# Altium PCB Brd_4_Sensor_Shield_Kevin_Tom.PcbDoc
Units mil, origin at the board's own origin, x right, y up, seen from the top; angles counter-clockwise.
Board outline 2710 x 2110 mil, 4 copper layers (Top Layer 1, Layer 1, Layer 2, Bottom Layer 1), stack 75.712 mil thick; 44 components, 24 nets, 150 pads, 67 vias.
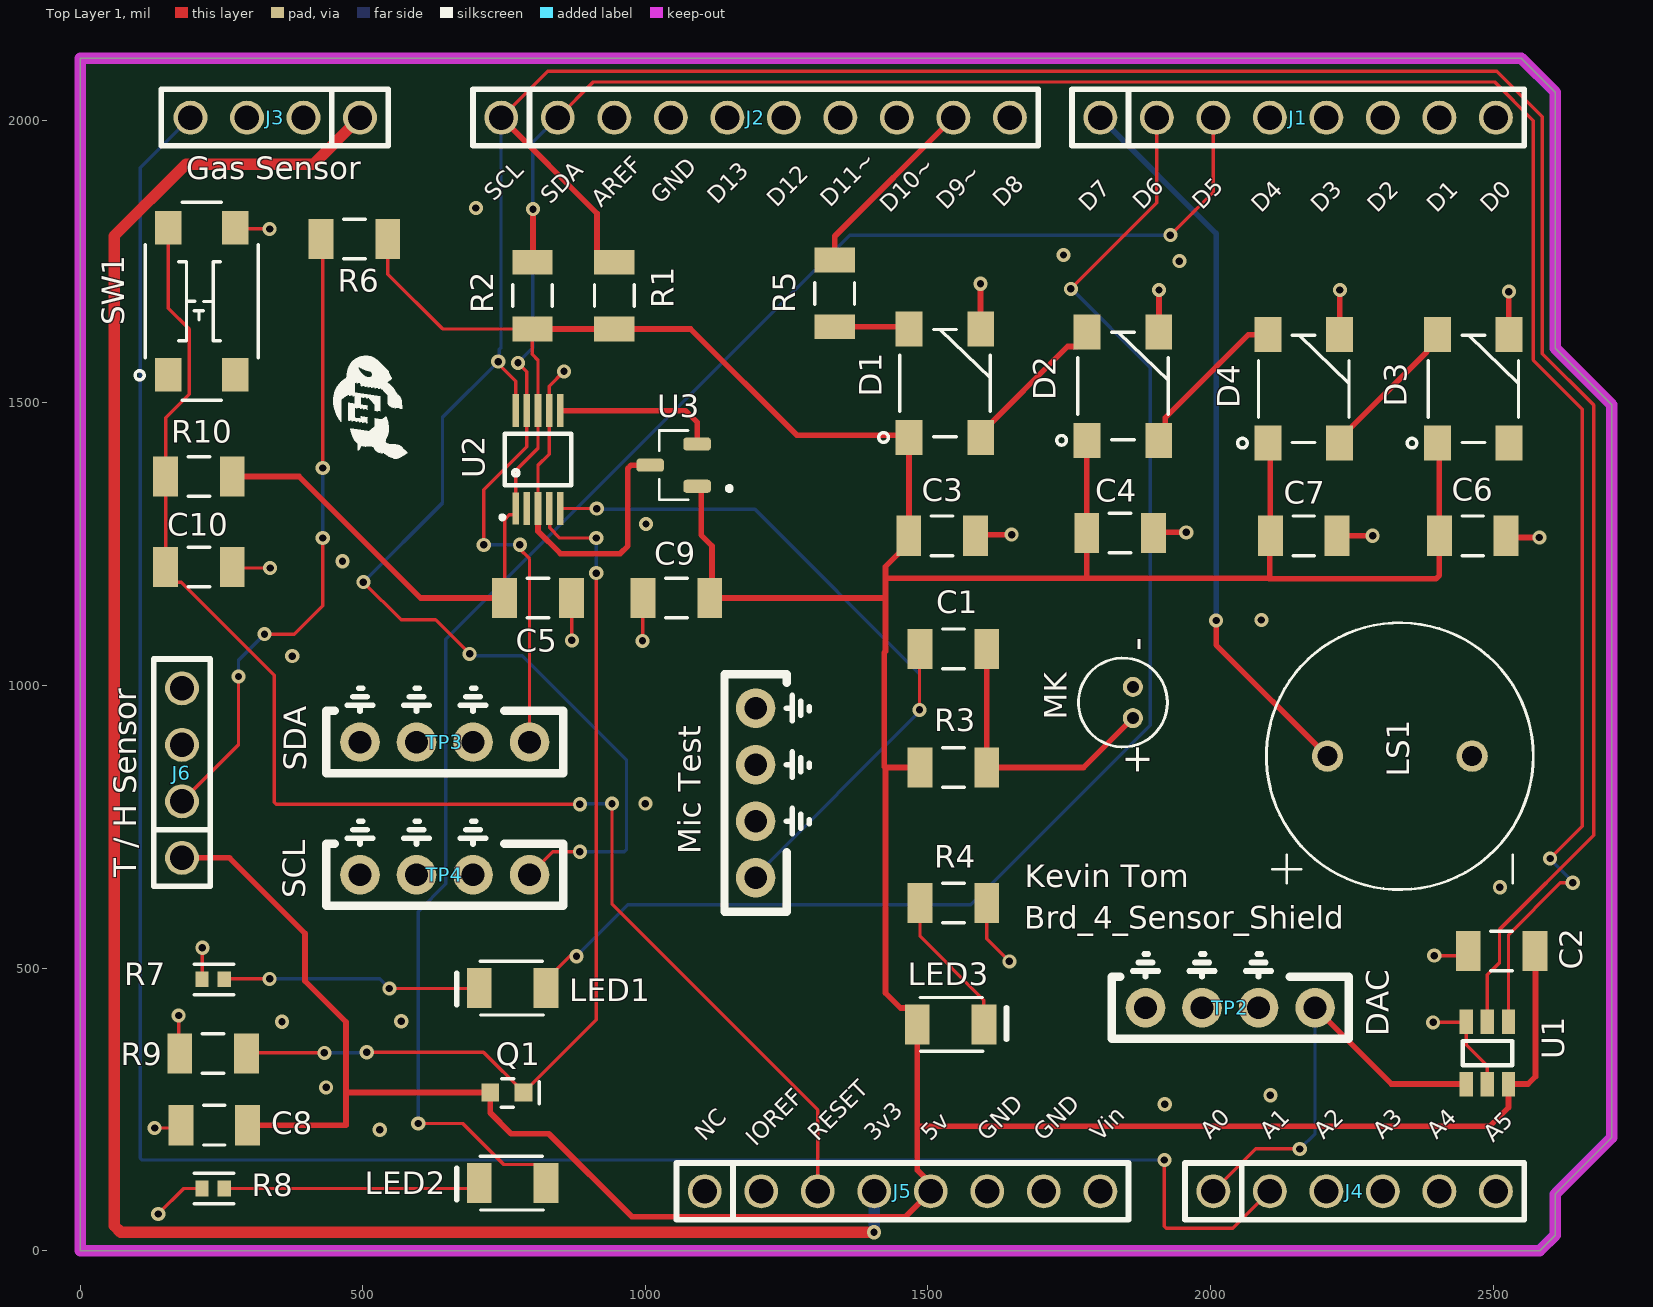
[diagram p0: Top Layer 1 view]
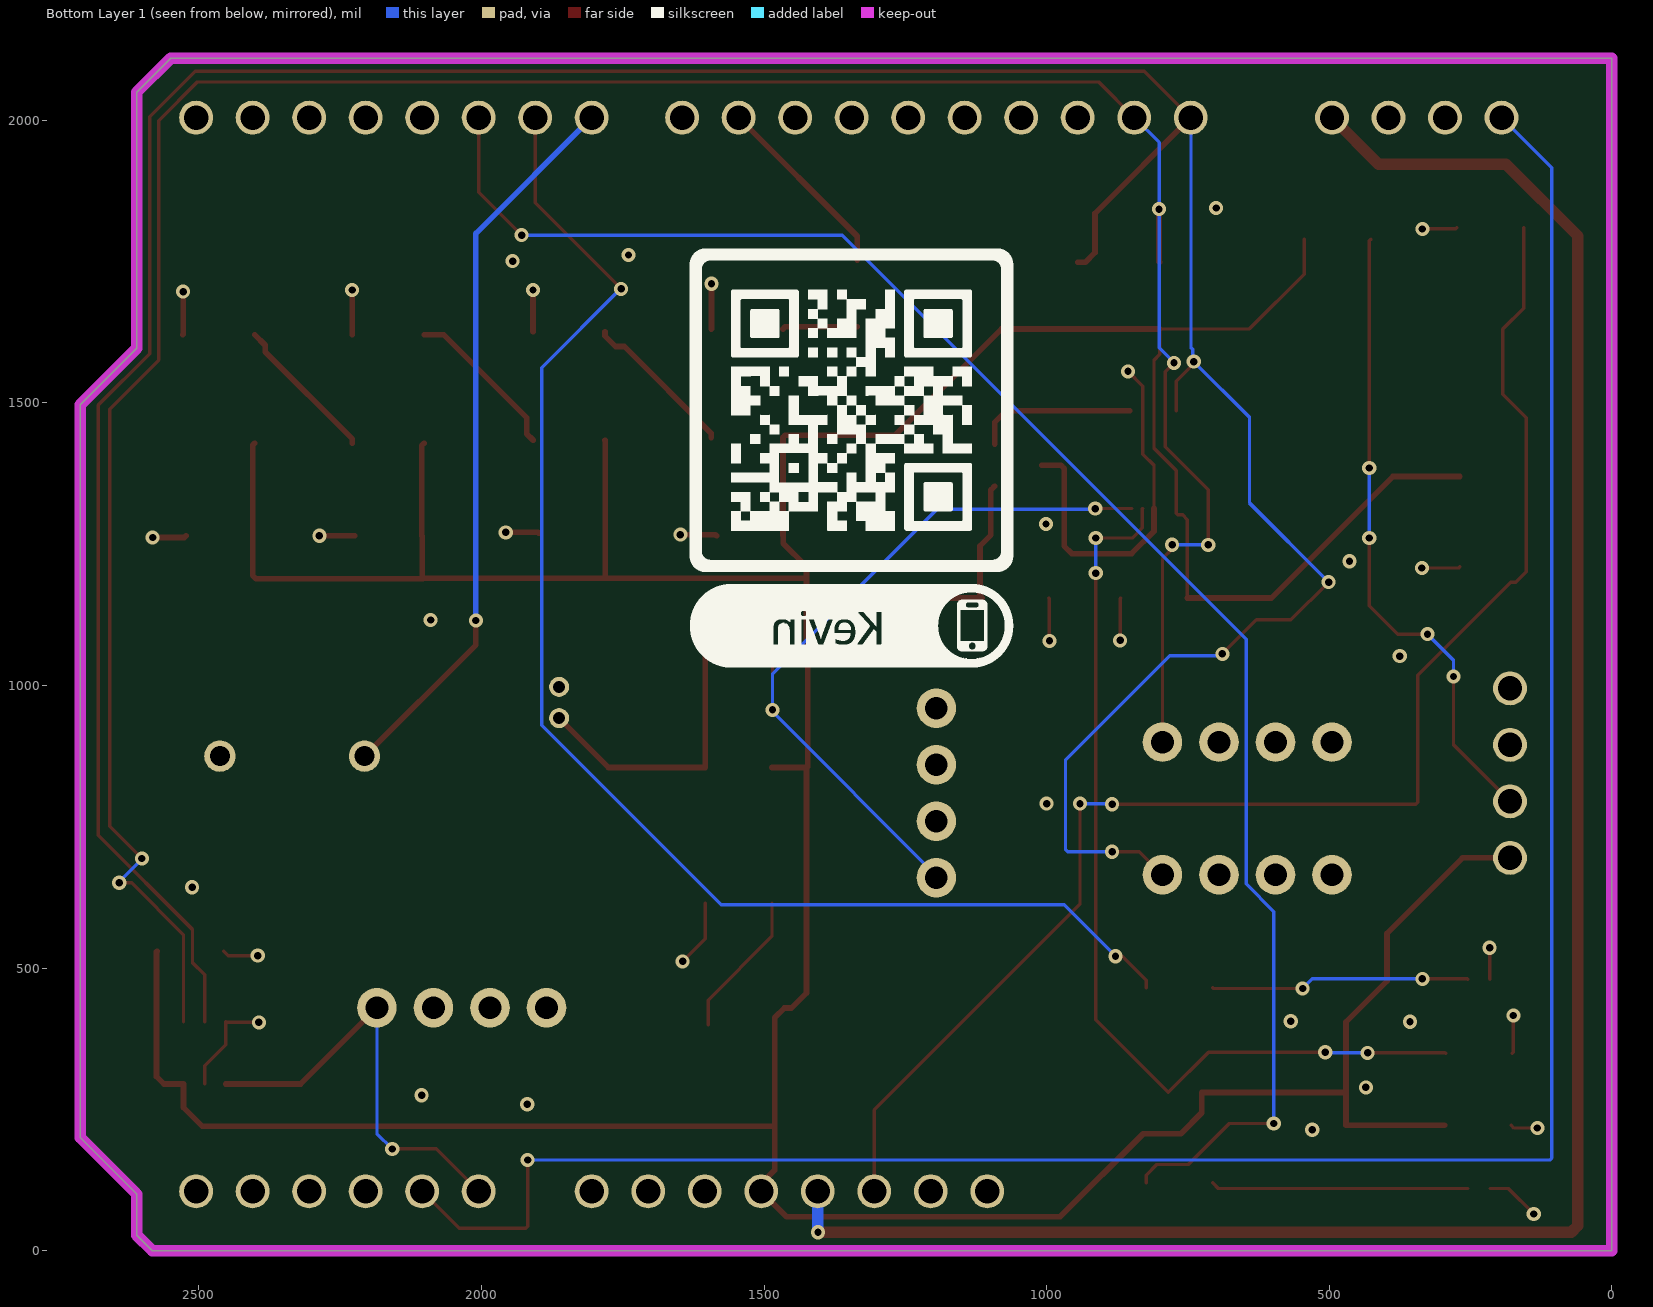
[diagram p1: Bottom Layer 1 view, seen from below]
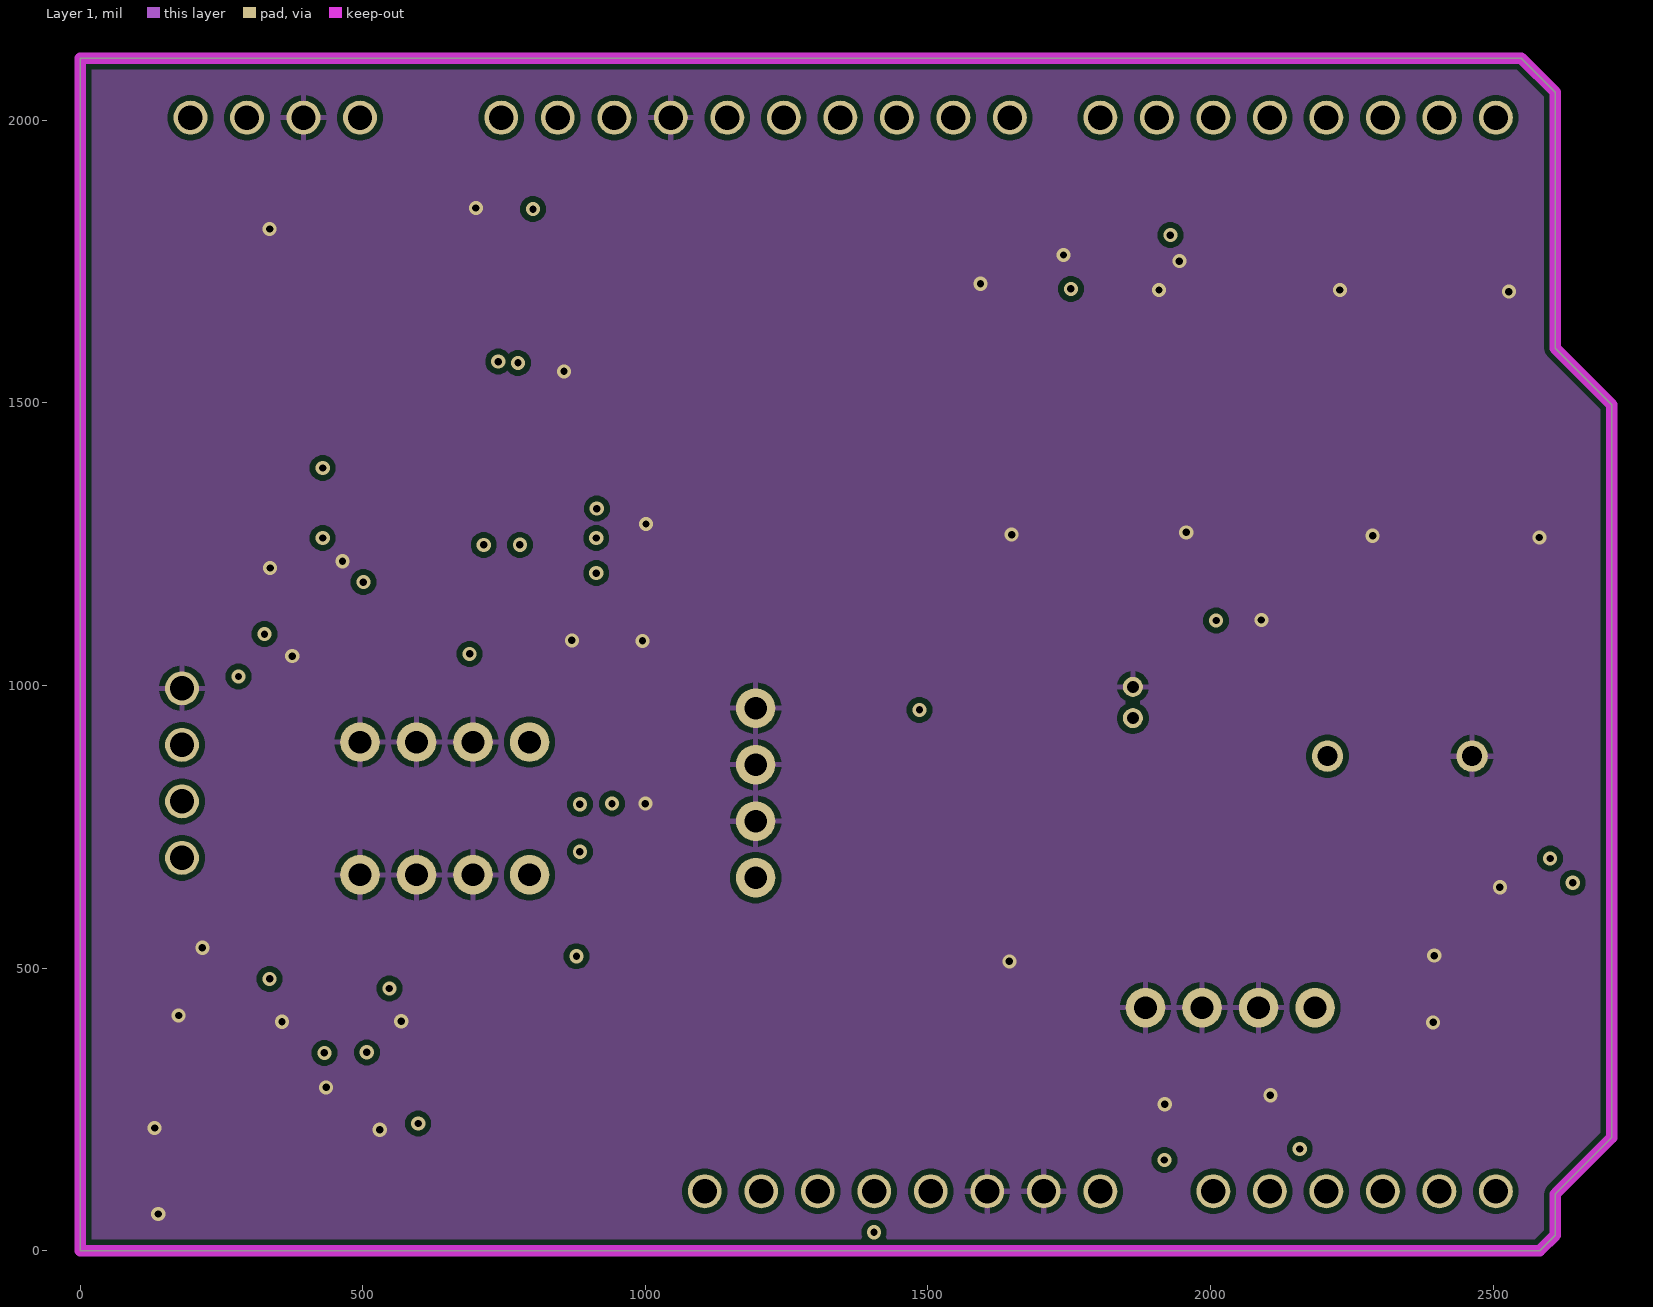
[diagram p2: Layer 1]
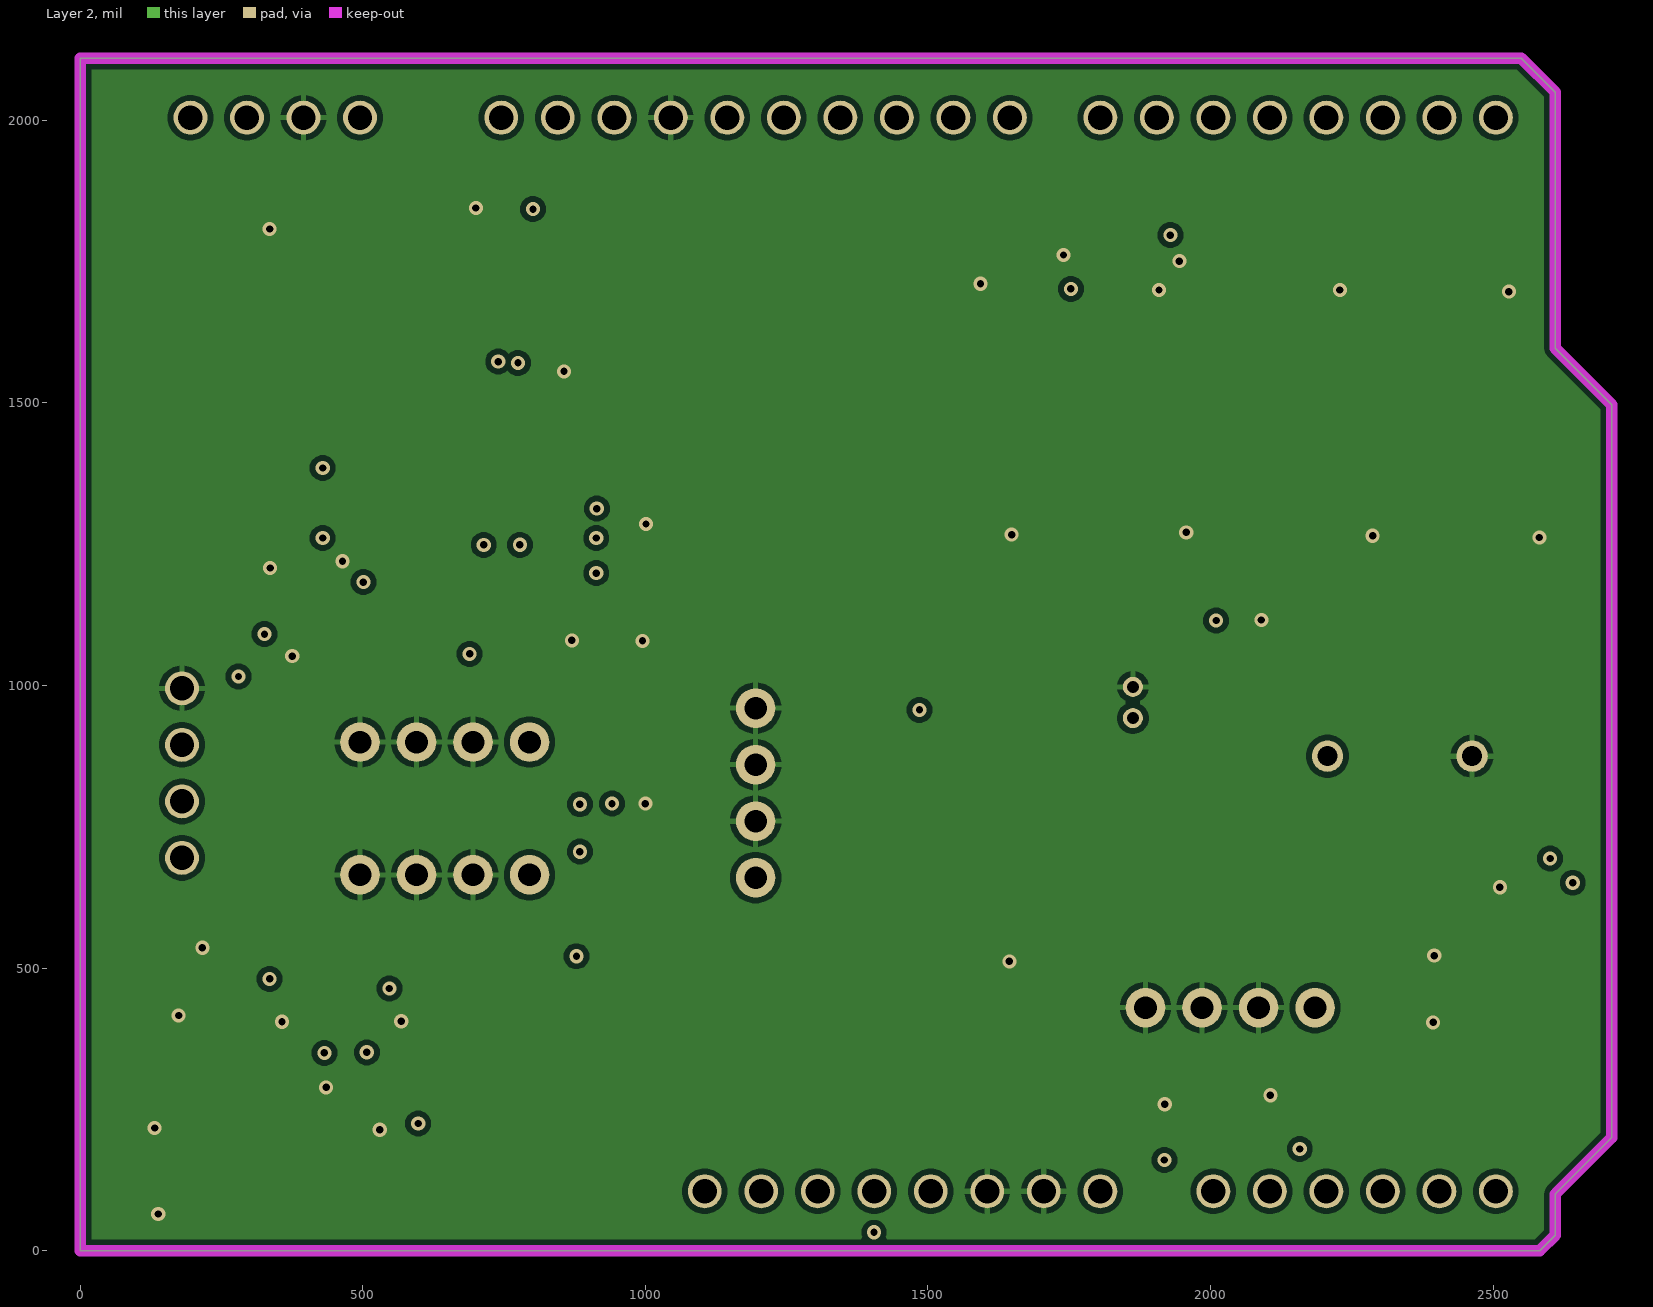
[diagram p3: Layer 2]
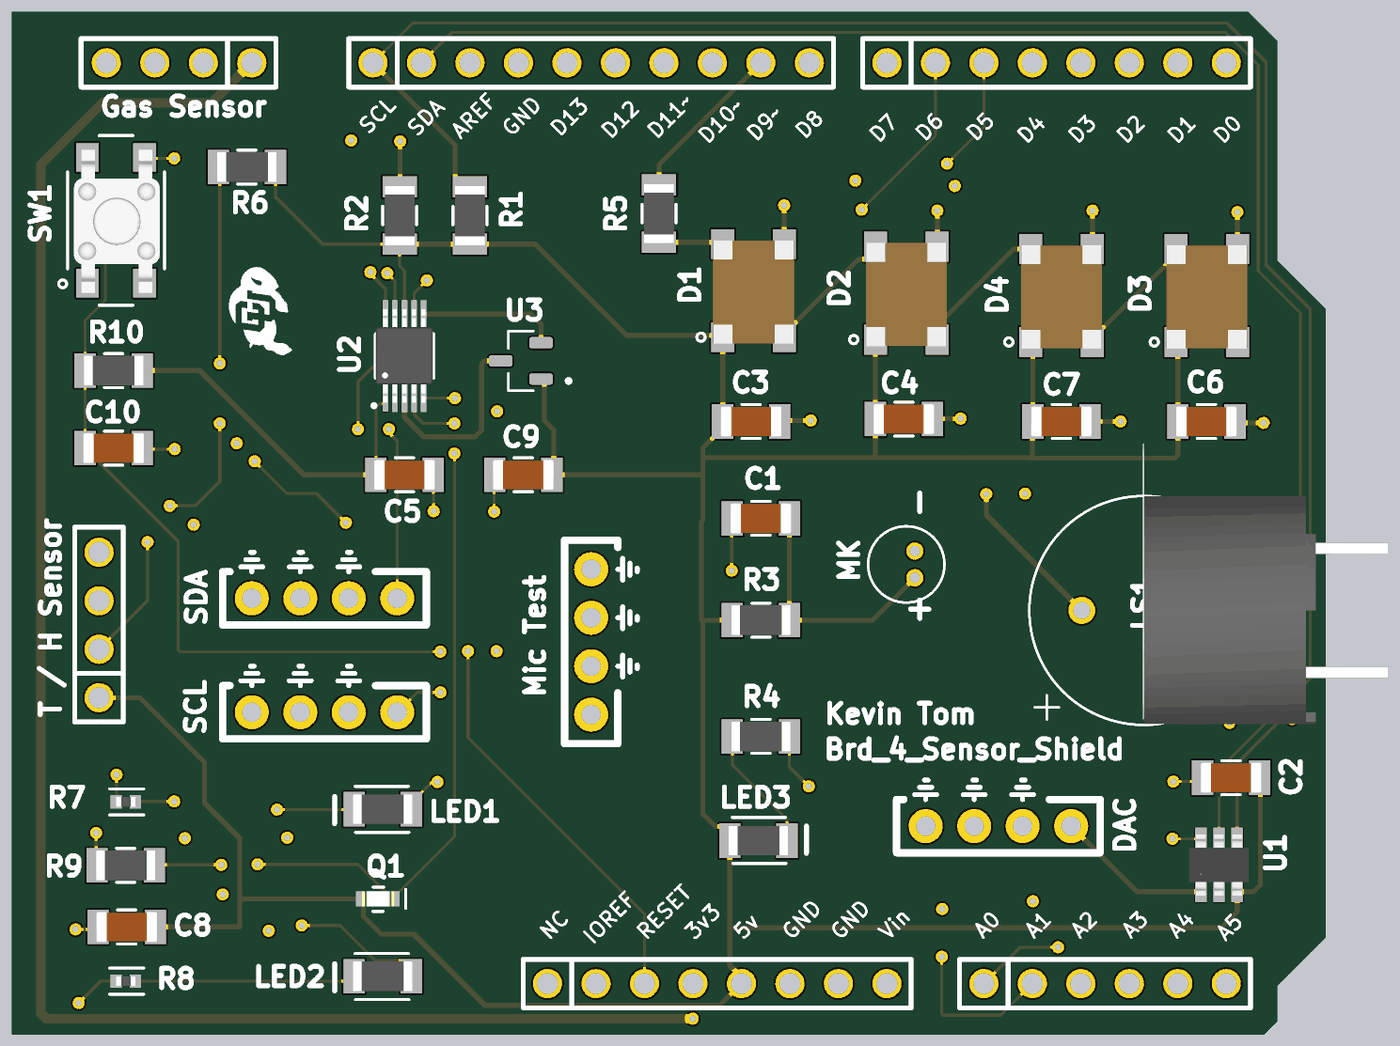
[diagram p4: 3D render of the assembled board from above, using the file's embedded part models]

## Layer stack, top to bottom
Top Solder: solder mask 1, SM-001, Dk 4
Top Layer 1: signal copper 1.378
Dielectric 2: prepreg 2.8, PP-006, Dk 4.1
Dielectric 4: prepreg 2.8, PP-006, Dk 4.1
Layer 1: signal copper 1.378
Dielectric 1: core 59, Core-043, Dk 4.3
Layer 2: signal copper 1.378
Dielectric 5: prepreg 2.8, PP-006, Dk 4.1
Dielectric 3: prepreg 2.8, PP-006, Dk 4.1
Bottom Layer 1: signal copper 1.378
Bottom Solder: solder mask 1, SM-001, Dk 4

## Board outline
0,0 0,2110 2550,2110 2610,2050 2610,1596.97 2710,1496.97 2710,200 2612.37,102.37 2612.37,102.33 2612.33,102.33 2610,100 2610,27.35 2582.65,0

## Design rules (kind name [scope] priority, off if disabled: settings)
BoardOutlineClearance [All] p1: gap=10 ignorepadtopadclearanceinfootprint=FALSE except(0: Arc-SplitContinuation Track-SplitContinuation SMDPad-SplitContinuation THPad-SplitContinuation Via-SplitContinuation Fill-SplitContinuation Poly-SplitContinuation Region-SplitContinuation Text-SplitContinuation)
Clearance [All] p1: gap=10 ignorepadtopadclearanceinfootprint=FALSE except(0: Arc-Hole Track-Hole SMDPad-Hole THPad-Hole Via-Hole Fill-Hole Poly-Hole Region-Hole Text-Hole)
PlaneClearance [All] p1: clearance=10
PlaneConnect [All] p1: planeconnectstyle=Direct reliefexpansion=20 reliefentries=4 reliefconductorwidth=10 reliefairgap=10
PolygonConnect [All] p1: thpad.connectstyle=Relief thpad.reliefconductorwidth=10 thpad.reliefentries=4 thpad.polygonreliefangle="90 Angle" thpad.airgapwidth=10 smdpad.connectstyle=Direct smdpad.reliefconductorwidth=10 smdpad.reliefentries=4 smdpad.polygonreliefangle="90 Angle" smdpad.airgapwidth=10 via.connectstyle=Direct via.reliefconductorwidth=10 via.reliefentries=4 via.polygonreliefangle="90 Angle" via.airgapwidth=10
RoutingVias [All] p1: holewidth=13 width=25 viastyle="Through Hole" minholewidth=13 minwidth=25 maxholewidth=60 maxwidth=80
SolderMaskExpansion [All] p1: expansion=4 istentingtop=FALSE
UnRoutedNet [All] p1: checkbadconnections=TRUE
Width "Schematic Width Constraint_1" [InNet('3v3')] p1: maxlimit=100 minlimit=10 preferedwidth=20 toplayer_minwidth=20 midlayer1_maxwidth=10 midlayer1_prefwidth=10 midlayer2_maxwidth=10 midlayer2_prefwidth=10 bottomlayer_minwidth=20 minimp=50.000000 maximp=50.000000 favimp=50.000000
Width "Schematic Width Constraint" [InNet('5v')] p2: maxlimit=100 minlimit=10 preferedwidth=20 toplayer_minwidth=20 midlayer1_maxwidth=10 midlayer1_prefwidth=10 midlayer2_maxwidth=10 midlayer2_prefwidth=10 bottomlayer_minwidth=20 minimp=50.000000 maximp=50.000000 favimp=50.000000
Width [All] p3: maxlimit=10 minlimit=6 preferedwidth=10 toplayer_prefwidth=6 midlayer1_minwidth=10 midlayer2_minwidth=10 bottomlayer_prefwidth=6 minimp=50.000000 maximp=50.000000 favimp=50.000000
27 further rules are at their usual default settings.

## Components (designator, comment, footprint, x,y, rotation, side; value= is the part's Value field where it differs from the comment)
C1 "1uF" 1206_Passive_Capacitor 1545,1065 r0 top
C2 "10uF" 1206_Passive_Capacitor 2515,530 r0 top
C3 "10uF" 1206_Passive_Capacitor 1525,1265 r0 top
C4 "10uF" 1206_Passive_Capacitor 1840,1270 r0 top
C5 "10uF" 1206_Passive_Capacitor 810,1155 r180 top
C6 "10uF" 1206_Passive_Capacitor 2464,1265 r0 top
C7 "10uF" 1206_Passive_Capacitor 2165,1265 r0 top
C8 "10uF" 1206_Passive_Capacitor 237,222 r180 top
C9 "10uF" 1206_Passive_Capacitor 1055,1155 r180 top
C10 "1uF" 1206_Passive_Capacitor 210,1210 r180 top
D1 "IN-PI55QATPRPGPBPW" SERIAL_LED 1530,1535 r90 top
D2 "IN-PI55QATPRPGPBPW" SERIAL_LED 1845,1530 r90 top
D3 "IN-PI55QATPRPGPBPW" SERIAL_LED 2465,1525 r90 top
D4 "IN-PI55QATPRPGPBPW" SERIAL_LED 2165,1525 r90 top
J1 "PPTC081LFBN-RC" 8_PIN_ARDUINO_100MIL 1805,2005 r0 top value=Female
J2 "PPTC101LFBN-RC" 10_PIN_ARDUINO_100MIL 745,2005 r0 top value=Female
J3 "Gas Sensor" 4_PIN_100MIL 495,2005 r180 top value=Female
J4 "PPTC061LFBN-RC" 6_PIN_ARDUINO_100mil 2005,105 r0 top value=Female
J5 "PPTC081LFBN-RC" 8_PIN_ARDUINO_100MIL 1105,105 r0 top value=Female
J6 "T / H Sensor" 4_PIN_100MIL 180,695 r90 top value=Female
LED1 "Red" LED_1206 765,465 r180 top
LED2 "Red" LED_1206 765,120 r180 top
LED3 "Green" LED_1206 1540,400 r0 top
LS1 "LS_BUZZER_AT-1224-TWT-5V-2-R" XDCR_AT-1224-TWT-5V-2-R 2335,875 r90 top
"Mic Test" "10x Probe TP" TP10x_Probe 1195,810 r90 top
MK "MK_Mic_CMEJ-0415-42-P" MK_MIC_CMEJ-0415-42-P 1845,970 r90 top
Q1 "ALS-PT19-315C/L177/TR8" LED_77/TR8_EVE 755,280 r0 top
R1 "10k" 1206_Passive_Resitor 945,1690 r270 top value=10KOhm
R2 "10k" 1206_Passive_Resitor 800,1690 r90 top value=10KOhm
R3 "1k" 1206_Passive_Resitor 1545,855 r0 top value="1K Ohm"
R4 "47 Ohms" 1206_Passive_Resitor 1545,615 r180 top value=47Ohm
R5 "1k" 1206_Passive_Resitor 1335,1694 r90 top value="1K Ohm"
R6 "10k" 1206_Passive_Resitor 485,1790 r0 top value=10KOhm
R7 "50 Ohms" 0402_Passive_Resistor 235,480 r0 top value=49.9Ohm
R8 "50 Ohms" 0402_Passive_Resistor 235,110 r0 top value=49.9Ohm
R9 "10k" 1206_Passive_Resitor 235,349 r0 top value=10KOhm
R10 "10k" 1206_Passive_Resitor 210,1370 r0 top value=10KOhm
SW1 "TL3305AF160QG" Switch_JLC 215,1680 r90 top
TP2 "DAC" TP10x_Probe 2035,430 r180 top
TP3 "SDA" TP10x_Probe 645,900 r180 top
TP4 "SCL" TP10x_Probe 645,665 r180 top
U1 "MCP4725A0T-E/CH" DAC_MCP4725A0T-E/CH 2490,350 r0 top
U2 "ADS1115IDGSR" ADC_ADS1115IDGSR 810,1400 r90 top
U3 "U_Hall_Effect_DRV5053RAQDBZT" U_Hall_Effect_SOT95P237X112-3N 1050,1390 r180 top

## Footprints (in the part's own frame and the unit in brackets; to place one, negate y for a bottom-side part, rotate by r counter-clockwise, add the part's x,y. Pads: shape width x height; smd on the part's side, far side on the other; paste and mask are expansions set on the pad)
4_PIN_100MIL [mil]
  round 60 hole 43.31: 1(0,0) 2(100,0) 3(200,0) 4(300,0)
  silkscreen extent -50,-50 352,50
6_PIN_ARDUINO_100mil [mil]
  round 60 hole 43.31: 1(0,0) 2(100,0) 3(200,0) 4(300,0) 5(400,0) 6(500,0)
  silkscreen extent -50,-50 550,50
8_PIN_ARDUINO_100MIL [mil]
  round 60 hole 43.31: 1(0,0) 2(100,0) 3(200,0) 4(300,0) 5(400,0) 6(500,0) 7(600,0) 8(700,0)
  silkscreen extent -50,-50 750,50
10_PIN_ARDUINO_100MIL [mil]
  round 60 hole 43.31: 1(0,0) 2(100,0) 3(200,0) 4(300,0) 5(400,0) 6(500,0) 7(600,0) 8(700,0) 9(800,0) 10(900,0)
  silkscreen extent -50,-50 950,50
0402_Passive_Resistor [mm] "Reference: https://www.worthingtonassembly.com/perfect-0402-footprint"
  rect 0.6x0.7 smd mask+0: 1(-0.5,0) 2(0.5,0)
  silkscreen extent -0.84,-0.69 0.94,0.69, body extent -0.49,-0.25 0.51,0.25, height 0.4
1206_Passive_Capacitor [mil]
  rect 44x71 smd: 1(-59,0) 2(59,0)
  silkscreen extent -19,-35 19,35, body extent -63,-31 63,32, height 50
1206_Passive_Resitor [mil]
  rect 44x71 smd: 1(-59,0) 2(59,0)
  silkscreen extent -19,-35 19,35, body extent -61,-31 61,31, height 26
ADC_ADS1115IDGSR [mm] "*SOP50P490X110-10N"
  rect 1.45x0.3 smd mask+0.025: 1(-2.2,1)
  rect 1.47x0.3 smd mask+0.025: 2(-2.2,0.5) 3(-2.2,0) 4(-2.2,-0.5) 5(-2.2,-1) 6(2.2,-1) 7(2.2,-0.5) 8(2.2,0) 9(2.2,0.5) 10(2.2,1)
  silkscreen extent -2.68,-1.5 1.15,1.68, body extent -2.44,-1.49 2.46,1.51, height 1.1
DAC_MCP4725A0T-E/CH [mm]
  rect 0.6x1.1 smd mask+0.05: 1(-0.95,-1.4) 1(-0.95,-1.4) 1(-0.95,-1.4) 2(0,-1.4) 3(0.95,-1.4) 4(0.95,1.4) 4(0.95,1.4) 5(0,1.4) 6(-0.95,1.4)
  silkscreen extent -1.12,-0.56 1.12,0.53, body extent -1.55,-1.6 1.55,1.6, height 1.45
LED_77/TR8_EVE [mm]
  rect 0.8x0.8 smd paste+0 mask+0: 1(-0.75,0) 2(0.75,0)
  silkscreen extent -0.27,-0.66 1.46,0.61, body extent -0.84,-0.4 0.86,0.4, height 0.6
LED_1206 [mil]
  rect 44x71 smd: 1(-59,0) 2(59,0)
  silkscreen extent -54,-47 99,48, body extent -61,-31 61,31, height 26
MK_MIC_CMEJ-0415-42-P [mm] "4.0mm Omnidorectional Mic"
  round 0.9 hole 0.55: N(0.7,-0.45) P(-0.7,-0.45)
  silkscreen extent -2,-2 2,2
SERIAL_LED [mil] "Footprint for serial LED"
  rect 62x47.5 smd: 1(-96,63.5) 2(-96,-63.5) 3(96,-63.5) 4(96,63.5)
  silkscreen extent -105,-80 95,117, body extent -109,-84 103,84, height 63
Switch_JLC [mm]
  rect 1.5x1.2 smd: 1(-3.3,1.5) 2(3.3,1.5) 3(-3.3,-1.5) 4(3.3,-1.5)
  silkscreen extent -4.44,-2.54 4.45,3, body extent -3.8,-2.29 3.7,2.21, height 3.7
TP10x_Probe [mil] "Small Probs footprint"
  round 70 hole 40: 1(-150,0) 2(-50,0) 2(50,0) 2(150,0)
  silkscreen extent -210,-95 210,55
U_Hall_Effect_SOT95P237X112-3N [mm]
  rrect50% 1.24x0.59 smd: 1(-1.055,0.95) 2(-1.055,-0.95) 3(1.055,0)
  silkscreen extent -2.6,-1.56 0.65,1.56
XDCR_AT-1224-TWT-5V-2-R [mm]
  round 1.408 hole 0.9: N(0,-3.25) P(0,3.25)
  silkscreen extent -6,-6 6,6, body extent -6,-12.8 8.75,0.05, height 6

## Part data
C1 C10: library part C_1uF_1206, "MULTILAYER CERAMIC CAPACITORS MLCC - SMD/SMT 1UF 50V 1206 ROHS", LCSC Part#=C1848, MFR Part #=CL31B105KBHNNNE, Digikey Link=https://www.digikey.com/product-detail/en/C1206C105M4RACTU/399-8150-1-ND/3471873/?itemSeq=304982366, Digikey Part=399-8150-1-ND, Type=Basic
C2 C3 C4 C5 C6 C7 C8 C9: library part C_10uF_1206, "10uF ±10% 50V X5R 1206 Multilayer Ceramic Capacitors MLCC - SMD/SMT RoHS", LCSC Part#=C13585, MFR Part #=CL31A106KBHNNNE, Datasheet=https://datasheet.lcsc.com/lcsc/1810221112_Samsung-Electro-Mechanics-CL31A106KBHNNNE_C13585.pdf, Type=Basic
D1 D2 D3 D4: library part LED_Smart_5050, "Digital Series Cascade LED", DigiKey=https://www.digikey.com/product-detail/en/inolux/IN-PI55QATPRPGPBPW-60/1830-1209-1-ND/9681289
J1 J5: library part JF_8_PIN_FEMALE_ARDUINO, "8 Position Header Connector 0.100\" (2.54mm) Through Hole Tin", LCSC Part#=C27438, Digikey Link=https://www.digikey.com/product-detail/en/PPTC081LFBN-RC/S7006-ND/810147/?itemSeq=304982354, Digikey Part=S7006-ND, Type=Extended
J2: library part JF_10_PIN_FEMALE_ARDUINO, "10 Position Header Connector 0.100\" (2.54mm) Through Hole Tin", LCSC Part#=C225507, Digikey Link=https://www.digikey.com/product-detail/en/PPTC101LFBN-RC/S7008-ND/810149/?itemSeq=304982352, Digikey Part=S7008-ND, Type=Extended
J3 J6: library part JF_4_PIN_FEMALE_ARDUINO, "4 Position Header Connector 0.100\" (2.54mm) Through Hole Tin", LCSC Part#=C40877, Digikey Link=https://www.digikey.com/product-detail/en/PPTC061LFBN-RC/S7004-ND/810145/?itemSeq=304982353, Digikey Part=S7004-ND, Type=Extended
J4: library part JF_6_PIN_FEMALE_ARDUINO, "6 Position Header Connector 0.100\" (2.54mm) Through Hole Tin", LCSC Part#=C40877, Digikey Link=https://www.digikey.com/product-detail/en/PPTC061LFBN-RC/S7004-ND/810145/?itemSeq=304982353, Digikey Part=S7004-ND, Type=Extended
LED1 LED2: library part LED_RED_1206, "Red 621~631nm 1206 Light Emitting Diodes (LED) RoHS", LCSC Part#=C93133, MFR Part #=15-21/R6C-FQ1R1B/2T, Datasheet=https://datasheet.lcsc.com/szlcsc/1811151241_Everlight-Elec-15-21-R6C-FQ1R1B-2T_C93133.pdf, Type=Extended
LED3: library part LED_GREEN_1206, "Green 513~528nm 1206 Light Emitting Diodes (LED) RoHS", LCSC Part#=C434439, MFR Part #=SZYY1206G, Datasheet=https://datasheet.lcsc.com/lcsc/2006301532_Yongyu-Photoelectric-SZYY1206G_C434439.pdf, Type=Extended
LS1: "AUDIO TRANSDUCER 5 VP-P 87 DB 2400 HZ", MFR Part #=AT-1224-TWT-5V-2-R, Package="PUI Audio,", Availability="In Stock", Check_prices=https://www.snapeda.com/parts/AT-1224-TWT-5V-2-R/PUI%20Audio,%20Inc./view-part/453710/?ref=eda, Datasheet=https://www.puiaudio.com/media/SpecSheet/AT-1224-TWT-5V-2-R.pdf, MF="PUI Audio,", MP=AT-1224-TWT-5V-2-R, Price=None, Purchase-URL=https://pricing.snapeda.com/search/part/AT-1224-TWT-5V-2-R/?ref=eda, SnapEDA_Link=https://www.snapeda.com/parts/AT-1224-TWT-5V-2-R/PUI%20Audio,%20Inc./view-part/453710/?ref=snap
"Mic Test" TP2 TP3 TP4: library part TP_10x_Probe, "Test Point 300 mil centers"
MK: "0.4mm OMNIDIRECTIONAL MIC", MFR Part #=CMEJ-0415-42-P, Package="CUI Inc.", CUI_purchase_URL=https://www.cuidevices.com/product/audio/microphones/electret-condenser-microphones/cmej-0415-42-p?utm_source=snapeda.com&utm_medium=referral&utm_campaign=snapedaBOM, Datasheet=https://www.cuidevices.com/product/resource/cmej-0415-42-p.pdf, Digi-Key_Part_Number=102-6542-ND, Digi-Key_Purchase_URL=https://www.digikey.com/product-detail/en/cui-devices/CMEJ-0415-42-P/102-6542-ND/10253451?utm_source=snapeda&utm_medium=aggregator&utm_campaign=symbol, MF="CUI Devices", SnapEDA_Link=https://www.snapeda.com/parts/CMEJ-0415-42-P/CUI%20Devices/view-part/3625885/?ref=snap
Q1: library part Q_Phototransistor, "Ambient Light Sensor", LCSC Part#=C146233, Datasheet=https://www.everlight.com/file/ProductFile/201407061531031645.pdf, MFR Part #=ALS-PT19-315C/L177/TR8, Type=Extended
R1 R2 R6 R9 R10: library part R_10KOhm_1206, "10 kOhms ±5% 0.25W, 1/4W Chip Resistor 1206 (3216 Metric) Automotive AEC-Q200 Thick Film", LCSC Part#=C17902, Digikey Link=https://www.digikey.com/product-detail/en/RMCF1206JT300R/RMCF1206JT300RCT-ND/1942776/?itemSeq=304982374, Digikey Part=RMCF1206JT300RCT-ND, Type=Basic
R3 R5: library part R_1K_1206, "CHIP RESISTOR - SURFACE MOUNT 1KOHMS ±1% 1/4W 1206 ROHS", LCSC Part#=C4410, MFR Part #=1206W4F1001T5, Digikey Link=https://www.digikey.com/product-detail/en/RNCP1206FTD1K00/RNCP1206FTD1K00CT-ND/2240675/?itemSeq=304982373, Digikey Part=RNCP1206FTD1K00CT-ND, Type=Basic
R4: library part R_47Ohm_1206, "47Ω ±5% 0.25W ±200ppm/℃ 1206 Chip Resistor - Surface Mount RoHS", LCSC Part#=C25384, MFR Part #=1206W4J0470T5E, Datasheet=https://datasheet.lcsc.com/lcsc/1811101020_UNI-ROYAL-Uniroyal-Elec-1206W4J0470T5E_C25384.pdf, Type=Extended
R7 R8: library part R_50Ohm_0402, "CHIP RESISTOR - SURFACE MOUNT 49.9OHMS ±1% 1/16W 0402 ROHS", LCSC Part#=C25120, MFR Part #=0402WGF499JTCE, Datasheet=https://datasheet.lcsc.com/szlcsc/Uniroyal-Elec-0402WGF499JTCE_C25120.pdf, Type=Basic
SW1: library part SW_Push_Button_JLC, "Tactile Switch SPST-NO Top Actuated Surface Mount", LCSC Part#=C174049, MFR Part #=C174049, Type=Extended
U1: library part U_DAC_MCP4725A0T-E/CH, "Voltage-Buffered 12 1 I2C SOT-23-6 Digital To Analog Converters (DACs) ROHS", LCSC Part#=C144198, Package=SOT-23-6L, Datasheet=https://datasheet.lcsc.com/lcsc/1811151442_Microchip-Tech-MCP4725A0T-E-CH_C144198.pdf, MFR Part #=MCP4725A0T-E/CH
U2: library part U_ADC_ADS1115IDGSR, "16-Bit ADC with Integrated MUX, PGA, Comparator, Oscillator, and Reference 10-VSSOP -40 to 125", LCSC Part#=C37593, Package="MSOP-10 Texas Instruments", Digi-Key_Purchase_URL=https://www.digikey.com/product-detail/en/texas-instruments/ADS1115IDGSR/296-38849-1-ND/5142969?utm_source=snapeda&utm_medium=aggregator&utm_campaign=symbol, MFR Part #=ADS1115IDGSR, SnapEDA_Link=https://www.snapeda.com/parts/ADS1115IDGSR/Texas%20Instruments/view-part/?ref=snap, Type=Extended
U3: "SENSOR LINEAR ANALOG SOT23-3", MFR Part #=DRV5053RAQDBZT, Package=None, Datasheet=https://www.ti.com/lit/ds/symlink/drv5053.pdf?HQS=dis-dk-null-digikeymode-dsf-pf-null-wwe&ts=1648501609471&ref_url=https%253A%252F%252Fwww.ti.com%252Fgeneral%252Fdocs%252Fsuppproductinfo.tsp%253FdistId%253D10%2526gotoUrl%253Dhttps%253A%252F%252Fwww.ti.com%252Flit%252Fgpn%252Fdrv5053, MP=DRV5053RAQDBZT

## Via types
v1: diameter 25, hole 13, Top Layer 1 to Bottom Layer 1, 67 vias

## Nets (pads, with @x,y where several pads share a name; then routed paths per layer and width w, separated by ;. In a path a pad name is that pad's centre, name@x,y a point inside that pad or via, vN(x,y) a via of type N, cw(c..) or ccw(c..) an arc to the next point about the centre after c; other vN are vias at no path point)
3v3: J3.1 J5.4 | length 3695.1
  Top Layer 1 w20: J3.1 412.54,1922.54 187.13,1922.54 60,1795.41 60,44.22 71.72,32.5 v1(1404.5,32.5)
  Bottom Layer 1 w20: v1(1404.5,32.5) 1404.75,32.75 1404.75,104.75 J5.4
5v: C2.2 C3.1 C4.1 C5.2 C6.1 C7.1 C8.1 C9.1 D1.1 D2.1 D3.1 D4.1 J5.5 J6.1 LED3.1 Q1.1 R1.2 R2.1 R3.1 R6.2 R10.2 U1.3 U2.1 U2.8 U3.1 | length 9229.3
  Top Layer 1 w6: R6.2 544,1728 641,1631 R2.1 800,1585.97 810,1575.97 U2.8 810,1419.88 770.63,1380.51 U2.1 770.63,1304.9 767.72,1302 759.24,1302 751,1293.76 C5.2
  Top Layer 1 w10: J6.1 264,695 397.75,561.25 397.75,477.25 470.33,404.67 470.33,280 ; R10.2 387.25,1370 602.25,1155 C5.2 ; C8.1 470.33,222 470.33,280 ; R2.1 R1.2 1080,1631 1268,1443 1462.5,1443 D1.1 1466.5,1265.5 C3.1 1466,1251.5 1425,1210.5 1425,1187 ; U3.1 1092.03,1352.6 1098.59,1346.05 1098.59,1266.41 1118,1247 1118,1159 C9.1 1118,1155 1425,1155 ; R3.1 1426,855 1425,854 ; D2.1 1781,1433.5 C4.1 1781,1192.93 1778.07,1190 ; D4.1 2106,1424.5 C7.1 2105,1264 2105,1190 ; D3.1 2405,1425.5 C6.1 2405,1194.86 2399.14,1189 2104,1189 2105,1190 ; C2.2 2575,529 2575,308 2561.88,294.88 U1.3 2527.4,253.4 2494,220 1481,220 ; 470.33,280 Q1.1 725.47,243.98 762.46,207 829,207 976,60 1460,60 J5.5 1505,118.53 1481,142.53 1481,220 ; 1425,854 1422.49,856.51 1422.49,1058.4 1425,1060.92 1425,1155 ; 1425,854 1425,456 1451.64,429.36 1464,429.36 1481,412.36 1481,220 ; 1425,1155 1425,1187 ; 1425,1187 1428,1190 1778.07,1190 ; 1778.07,1190 2105,1190
AD0: J4.1 TP2.1 U1.1 | length 768.8
  Top Layer 1 w6: J4.1 2080,180 v1(2158,180)
  Top Layer 1 w10: TP2.1 2320.12,294.88 U1.1@2452.6,294.88
  Bottom Layer 1 w6: v1(2158,180) 2185,207 TP2.1
AD1: J3.4 J4.2 | length 4024.1
  Top Layer 1 w6: v1(1918.3,160.37) 1918.27,160.33 1918.27,43.27 1921.78,39.76 2039.76,39.76 J4.2
  Bottom Layer 1 w6: J3.4 106,1916 106,163.88 109.51,160.37 v1(1918.3,160.37)
AIN0: Q1.2 R9.2 U2.4 | length 1679.6
  Top Layer 1 w6: R9.2 295,350 v1(432,350) ; v1(507,351) 713.53,351 Q1.2 913,408.47 v1(913,1199) ; U2.4 830.46,1312.61 830.46,1279.06 848.53,1261 v1(913,1261)
  Bottom Layer 1 w6: v1(432,350) 432.5,350.5 506.5,350.5 v1(507,351) ; v1(913,1199) v1(913,1261)
AIN1: "Mic Test.1" C1.1 U2.5 | length 1346.3
  Top Layer 1 w6: U2.5 911.61,1313.39 912,1313 v1(914,1313) ; v1(1485,957) 1485,1064 C1.1
  Bottom Layer 1 w6: v1(914,1313) 915,1312 1194,1312 1485,1021 1485,953.5 1195,663.5 1195,660
AIN2: U2.6 U3.2 | length 286.2
  Top Layer 1 w10: U2.6@852.59,1486.58 1071.1,1486.58 1091.54,1466.14 U3.2
D2: J6.2 R6.1 | length 1130.4
  Top Layer 1 w6: J6.2 280,895 v1(280,1016) ; v1(326,1091) 379,1091 429,1141 v1(429,1261) ; R6.1 429,1787 v1(429,1385)
  Bottom Layer 1 w6: v1(280,1016) 280,1045 v1(326,1091) ; v1(429,1261) v1(429,1385)
D5: J1.3 LED2.1 | length 2972.4
  Top Layer 1 w6: v1(598,225) 676.88,225 749.38,152.5 805,152.5 824,133.5 LED2.1 ; v1(1929,1797) 2005,1873 J1.3
  Bottom Layer 1 w6: v1(598,225) 598,600.12 647,649.12 647,1082.06 1361.94,1797 v1(1929,1797)
D6: J1.2 LED1.1 | length 2466.8
  Top Layer 1 w6: LED1.1 824,478.5 866.5,521 v1(878,521) ; v1(1753,1702) 1905,1854 J1.2
  Bottom Layer 1 w6: v1(878,521) 969,612 1575.72,612 1893.43,929.72 1893.43,1562.57 1754,1702 v1(1753,1702)
D7: J1.1 LS1.P | length 1296.5
  Top Layer 1 w10: v1(2010,1115) 2010,1072.05 LS1.P
  Bottom Layer 1 w10: J1.1 2010,1800 v1(2010,1115)
D9: J2.9 R5.2 | length 339
  Top Layer 1 w10: R5.2 1335,1795 J2.9
GND: "Mic Test.2" C2.1 C3.2 C4.2 C5.1 C6.2 C7.2 C8.2 C9.2 C10.1 D1.3 D2.3 D3.3 D4.3 J2.4 J3.2 J5.6 J5.7 J6.4 LS1.N MK.N R4.1 R7.1 R8.1 R9.1 SW1.4 TP2.2 TP3.2 TP4.2 U1.2 U1.6 U2.3 U2.7 U3.3 | length 2136.1
  Top Layer 1 w6: v1(131.5,217) 173,217 C8.2 ; v1(138,65) 183,110 R8.1 ; v1(174,416) 174,351 R9.1 ; R7.1 216,480.68 v1(216,536) ; C10.1 271,1208 v1(336,1208) ; SW1.4 275.98,1808 v1(335,1808) ; U2.3 810,1389.77 829.68,1409.45 U2.7 829.69,1529.69 v1(856,1556) ; C5.1 870,1154 v1(870,1080) ; v1(995,1079) 995,1154 C9.2 ; R4.1 1604,552 v1(1644,512) ; v1(2394,404) 2451.48,404 U1.6 2452.6,364.3 2490,326.89 U1.2 ; v1(2396,522) 2448,522 C2.1
  Top Layer 1 w10: U2.3 810,1273 849.5,1233.5 955.64,1233.5 969,1246.86 969,1384.14 974.86,1390 U3.3 ; C3.2 1586,1267 v1(1648,1267) ; v1(1593,1711) 1593,1631.5 D1.3 ; C4.2 1900,1271 v1(1957,1271) ; D2.3 1909,1626.5 v1(1909,1700) ; C7.2 v1(2287,1265) ; D4.3 2229,1621.5 v1(2229,1700) ; C6.2 2526,1262 v1(2582,1262) ; v1(2528,1697) 2528,1621.5 D3.3
  other v1: 530,214 1919,259 2106,275 435,289 357,405 568,406 2512,643 1000,791 375,1052 2090,1116 464,1220 1001,1286 1945,1751 1740,1762 700,1845
NetC1_2: C1.2 MK.P R3.2 | length 504.9
  Top Layer 1 w10: C1.2 R3.2 1775.28,855 MK.P
NetD1_2: D1.2 D2.4 | length 274
  Top Layer 1 w10: D1.2 1593.5,1446.25 1747.25,1600 1762.75,1600 1781.5,1618.75 D2.4
NetD1_4: D1.4 R5.1 | length 133.2
  Top Layer 1 w10: R5.1 1462.5,1635 D1.4
NetD2_2: D2.2 D4.4 | length 287.2
  Top Layer 1 w10: D2.2 1920.14,1445.64 1920.14,1474.14 2067,1621 D4.4
NetD3_4: D3.4 D4.2 | length 263.7
  Top Layer 1 w10: D4.2 2228.5,1436.25 2382.75,1590.5 2382.75,1602.25 D3.4
NetLED1_2: LED1.2 R7.2 | length 459.2
  Top Layer 1 w6: R7.2 255.69,481 v1(335,481) ; v1(547,464) 705,464 LED1.2
  Bottom Layer 1 w6: v1(335,481) 530,481 v1(547,464)
NetLED2_2: LED2.2 R8.2 | length 455.5
  Top Layer 1 w6: R8.2 696,110 LED2.2
NetLED3_2: LED3.2 R4.2 | length 261.8
  Top Layer 1 w6: R4.2 1486,556 1599,443 LED3.2
RESET: C10.2 J5.3 R10.1 SW1.2 | length 2569.9
  Top Layer 1 w6: SW1.2 155.94,1667.59 192.57,1630.97 192.57,1515.17 151,1473.6 R10.1 151,1201.51 170,1182.51 178.49,1182.51 343,1018 343,793.51 346.51,790 v1(884,790) ; v1(941,791) 941,613 1305,249 J5.3
  Bottom Layer 1 w6: v1(884,790) 884.5,790.5 940.5,790.5 v1(941,791)
SCL: J2.1 R1.1 TP4.1 U1.5 U2.10 | length 5940.3
  Top Layer 1 w6: v1(501,1183) 567.68,1116.32 628.68,1116.32 v1(689,1056) ; v1(739.58,1573.29) 739.58,1569.82 770.63,1538.77 U2.10 ; J2.1 827,2087 2506.44,2087 2587,2006.44 2587,1587.44 2678,1496.44 2678,734.94 2511.4,568.34 2511.4,509.52 2490,488.12 U1.5 ; TP4.1 836,706 v1(884,706)
  Top Layer 1 w10: J2.1 914.5,1835.5 914.5,1766 931.5,1749 R1.1
  Bottom Layer 1 w6: v1(501,1183) 641,1323 641,1474.71 v1(739.58,1573.29) 741.5,1575.21 741.5,1594.79 744.5,1597.79 744.5,2004.5 J2.1 ; v1(689,1056) 692,1053 782,1053 966.5,868.5 966.5,709.51 962.99,706 v1(884,706)
SDA: J2.2 R2.2 TP3.1 U1.4 U2.9 | length 4850.2
  Top Layer 1 w6: v1(714,1249) 714,1346.51 790.32,1422.82 U2.9 790.32,1555.14 v1(774.5,1570.96) ; v1(777.94,1249.06) 777.94,1248.94 776.49,1247.49 776.49,1242.51 795,1224 TP3.1 ; J2.2 908,2068 2502.81,2068 2571,1999.81 2571,1576 2658,1489 2658,751 v1(2601,694) ; U1.4@2527.4,405.12 2527.4,559.29 2619.12,651 v1(2641,651)
  Top Layer 1 w10: R2.2 801,1750 v1(801,1843)
  Bottom Layer 1 w6: v1(714,1249) v1@777.91,1249.03 ; v1(774.5,1570.96) 801,1597.46 v1(801,1843) 801,1961 J2.2 ; v1(2601,694) 2601,692.5 2641,652.5 v1(2641,651)
pads on no net: D3.2 J1.4 J1.5 J1.6 J1.7 J1.8 J2.3 J2.5 J2.6 J2.7 J2.8 J2.10 J3.3 J4.3 J4.4 J4.5 J4.6 J5.1 J5.2 J5.8 J6.3 SW1.1 SW1.3 U2.2

## Polygon pours and split planes (outlines as drawn)
GND on Layer 2 "GND_L03_P001" (solid, pour order 1): 0,2110 0,0 2583,0 2610,27 2610,100 2710,200 2710,1497 2610,1597 2610,2050 2550,2110
GND on Layer 1 "GND_L02_P000" (solid, pour order 0): 0,2110 0,0 2583,0 2583,0.35 2610,27.35 2610,100 2710,200 2710,1497 2610,1597 2610,2050 2550,2110

## Keep-outs
Keep-Out Layer:
  the board outline again, w20

## Silkscreen, mask and mechanical layers (free items; w line width, h text height)
Top Overlay:
  drawing of 2 lines, arcs and shapes, not listed
  text "Kevin Tom" at 1671,643 h40
  text "Brd_4_Sensor_Shield" at 1670,569.66 h40
Bottom Overlay:
  drawing of 47 lines, arcs and shapes, not listed

## Text inside footprints (layer, text, board x,y; h text height)
J1: Top Overlay "D0" at 2495,1835 h30 r45; Top Overlay "D1" at 2400,1835 h30 r45; Top Overlay "D2" at 2295,1835 h30 r45; Top Overlay "D3" at 2195,1835 h30 r45; Top Overlay "D4" at 2090,1835 h30 r45; Top Overlay "D5" at 1985,1840 h30 r45; Top Overlay "D6" at 1880,1840 h30 r45; Top Overlay "D7" at 1785,1837.07 h30 r45
J2: Top Overlay "SCL" at 732.24,1855 h30 r45; Top Overlay "SDA" at 832.24,1850 h30 r45; Top Overlay "AREF" at 922.24,1845 h30 r45; Top Overlay "GND" at 1027.24,1850 h30 r45; Top Overlay "D13" at 1127.24,1850 h30 r45; Top Overlay "D12" at 1232.24,1845 h30 r45; Top Overlay "D11~" at 1327.24,1845 h30 r45; Top Overlay "D10~" at 1432.24,1835 h30 r45; Top Overlay "D9~" at 1532.24,1840 h30 r45; Top Overlay "D8" at 1632.24,1845 h30 r45
J4: Top Overlay "A5" at 2500,190 h30 r45; Top Overlay "A4" at 2400,195 h30 r45; Top Overlay "A3" at 2305,195 h30 r45; Top Overlay "A2" at 2200,195 h30 r45; Top Overlay "A0" at 2000,195 h30 r45; Top Overlay "A1" at 2105,195 h30 r45
J5: Top Overlay "Vin" at 1805,192.07 h30 r45; Top Overlay "GND" at 1705,192.07 h30 r45; Top Overlay "GND" at 1605,192.07 h30 r45; Top Overlay "5v" at 1505,192.07 h30 r45; Top Overlay "3v3" at 1405,192.07 h30 r45; Top Overlay "RESET" at 1305,192.07 h30 r45; Top Overlay "IOREF" at 1195,183.39 h30 r45; Top Overlay "NC" at 1105,192.07 h30 r45
MK: Top Overlay "-" at 1892.24,1060.55 h50 r90; Top Overlay "+" at 1892.24,840.08 h50 r90; Mechanical 13 "-" at 1892.24,1060.55 h50 r90; Mechanical 13 "+" at 1892.24,840.08 h50 r90